# Altium PCB LVPowerModule.PcbDoc (part 2 of 2)
Units mm, origin at the board's own origin, x right, y up, seen from the top; angles counter-clockwise.
Board outline 100 x 60 mm, 2 copper layers (Top Layer, Bottom Layer); 81 components, 60 nets, 339 pads, 557 vias.
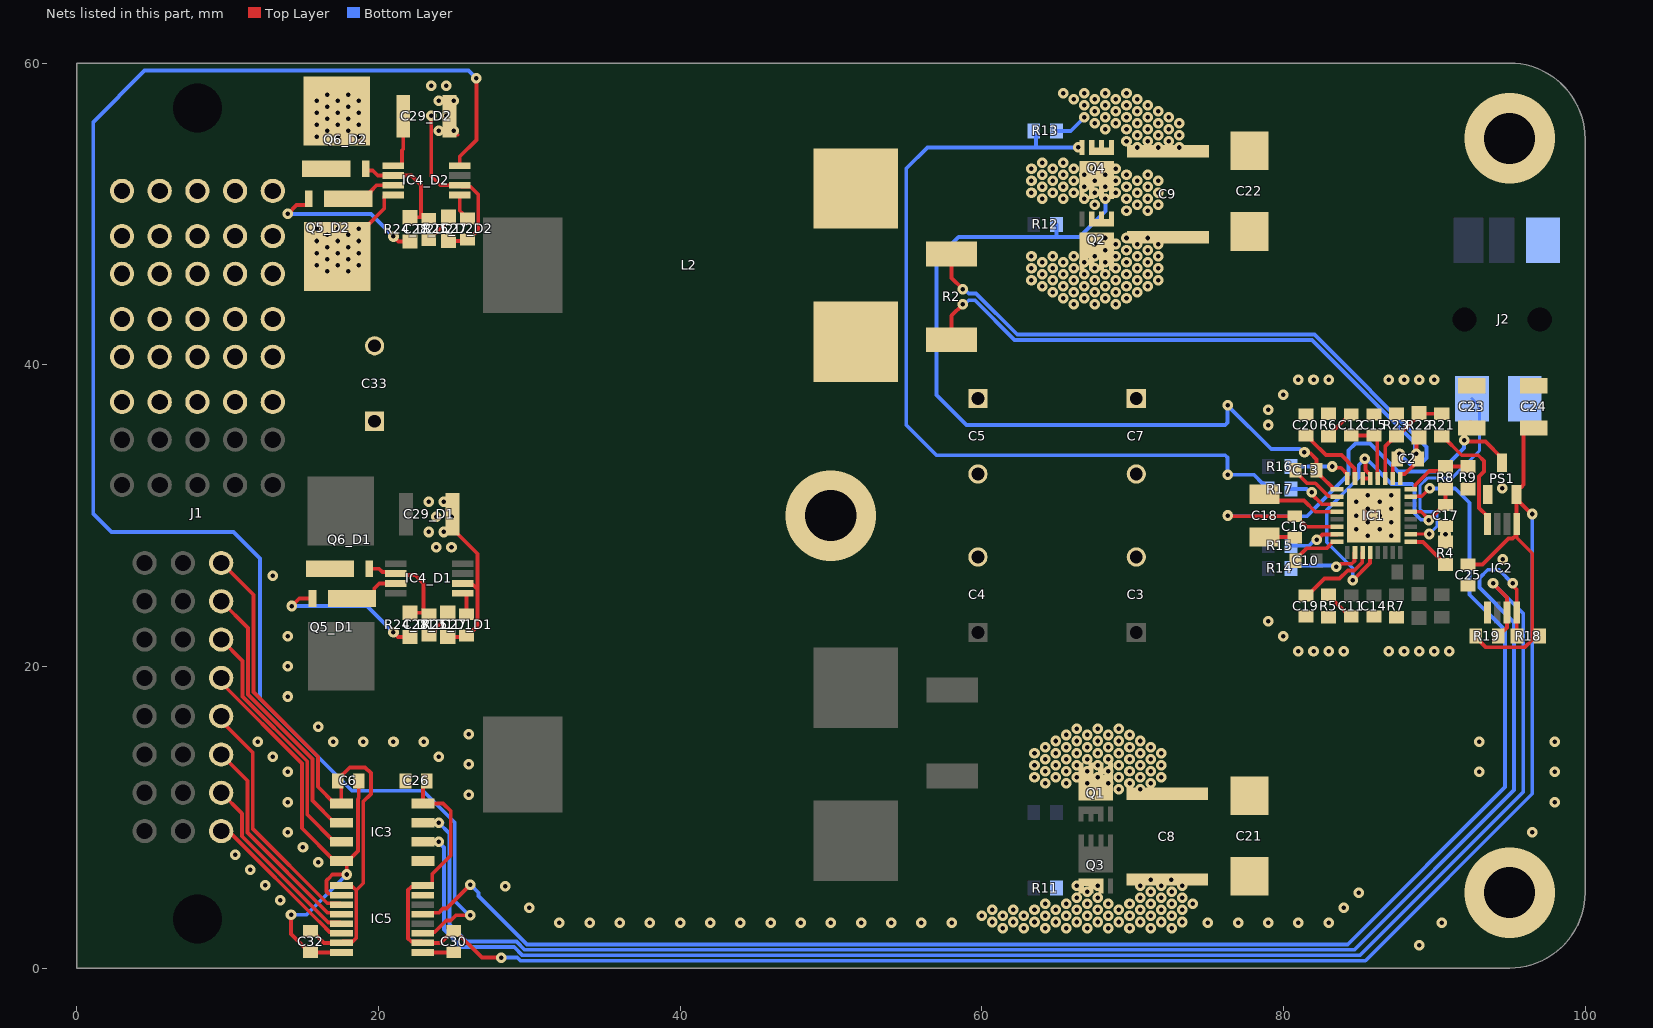
[diagram p2: the nets of this part, all layers, seen from the top]

## Via types
v1: diameter 0.7, hole 0.3, Top Layer to Bottom Layer, 554 vias
v2: diameter 6, hole 3.4, Top Layer to Bottom Layer, 3 vias

## Nets (pads, with @x,y where several pads share a name; then routed paths per layer and width w, separated by ;. In a path a pad name is that pad's centre, name@x,y a point inside that pad or via, vN(x,y) a via of type N, cw(c..) or ccw(c..) an arc to the next point about the centre after c; other vN are vias at no path point) (continued)
15FETL: Q4.4 R13.2 R17.2 | length 56.3
  Bottom Layer w0.254: R13.2@63.712,55.163 63.636,55.163 63.6,55.127 63.6,54.409 ; v1(66.395,54.409) 63.6,54.409 ; R17.2@79,31.75 79,31.825 78.702,32.123 78.627,32.123 78.05,32.7 v1(76.3,32.7) 76.3,33.843 76.143,34 57,34 55,36 55,53 56.409,54.409 63.6,54.409
15SW: C13.2 IC1.17 L2.1 Q2.1 Q2.2 Q2.3 Q2.10 Q4.5 Q4.6 Q4.7 Q4.8 Q4.9 R12.1 | length 54.6
  Top Layer w0.254: v1(81.4,34.2) 81.467,34.133 81.789,34.133 82.2,33.722 C13.2@82.2,33 82.2,32.9 82.503,32.597 82.512,32.597 83.252,31.857 83.252,31.773 83.275,31.75 IC1.17@83.55,31.75
  Bottom Layer w0.254: R12.1@64.95,49.3 64.95,48.498 64.975,48.473 ; v1(68.2,51) 68.2,50.2 66.473,48.473 64.975,48.473 ; v1(81.4,34.2) 81.279,34.2 81.079,34.4 79.2,34.4 v1(76.3,37.3) 76.3,36.157 76.143,36 59,36 57,38 57,47 58.473,48.473 64.975,48.473
  other v1: 69.6,50.2 71,50.2 67.5,50.6 70.3,50.6 71.7,50.6 64,51 65.4,51.004 66.8,51 69.6,51 71,51 63.3,51.4 64.7,51.4 66.1,51.4 67.5,51.4 68.9,51.4 70.3,51.4 71.7,51.4 64,51.8 65.4,51.8 66.8,51.8 68.2,51.8 69.6,51.8 71,51.8 63.3,52.2 64.7,52.2 66.1,52.2 67.5,52.2 68.9,52.2 70.3,52.2 71.7,52.2 64,52.6 65.4,52.6 66.8,52.6 68.2,52.6 69.6,52.6 71,52.6 63.3,53 64.7,53 66.1,53 67.5,53 68.9,53 64,53.4 65.4,53.4
15V: C2.2 C5.1 C7.1 IC1.9 IC4_D2.4 Q5_D2.5-6-7-8 R2.2 R22.2 | length 46.8
  Top Layer w0.254: Q5_D2.5-6-7-8@17.3,47.47 Q5_D2.5-6-7-8@18.765,48.935 ; v1(18.7,49) 19.04,49 20.387,50.347 20.387,51.147 20.485,51.245 IC4_D2.4@20.973,51.245 ; R2.2@58,41.75 58,43.25 v1(58.75,44) ; IC1.9@87.75,32.45 87.75,32.725 87.773,32.748 88.048,32.748 88.95,33.65 C2.2@88.95,33.75 C2.2@88.824,33.876 ; v1(88.824,34.101) C2.2@88.824,33.876 ; R22.2@89,35.2 88.824,35.024 C2.2@88.824,33.876
  Bottom Layer w0.254: v1(58.75,44) 58.871,44 59.144,44.273 59.555,44.273 62.184,41.644 81.906,41.644 88.738,34.812 88.738,34.187 v1(88.824,34.101)
  other v1: 16.6,46.2 18,46.2 15.9,46.6 17.3,46.6 18.7,46.6 16.6,47 18,47 15.9,47.4 17.3,47.4 18.7,47.4 16.6,47.8 18,47.8 15.9,48.2 17.3,48.2 18.7,48.2 16.6,48.6 18,48.6 15.9,49 17.3,49
15V+: C2.1 IC1.10 L2.2 R2.1 | length 42.8
  Top Layer w0.254: R2.1@58,47.25 58,45.75 v1(58.75,45) ; IC1.10@87.25,32.45 87.25,33.35 87.55,33.65 C2.1@87.55,33.75 ; C2.1@87.55,33.8 87.7,33.95 v1(87.7,34.1) 87.625,34.025 87.55,33.95 C2.1@87.55,33.8
  Bottom Layer w0.254: v1(58.75,45) 58.871,45 59.143,44.728 59.626,44.728 62.354,42 82.053,42 89.501,34.553 89.501,33.821 89.104,33.424 88.376,33.424 v1(87.7,34.1)
15V_COMP: C12.2 C15.2 IC1.12 | length 4.5
  Top Layer w0.254: C12.2@84.5,35.3 C15.2@86,35.3 86.227,35.073 86.227,32.473 IC1.12@86.25,32.45
15V_CTRL: IC1.7 IC5.13 | length 103
  Top Layer w0.254: IC5.13@22.95,3.568 23.041,3.659 23.998,3.659 24.183,3.844 24.186,3.844 24.294,3.952 24.526,3.952 v1(26.104,5.53) ; IC1.7@88.45,31.25 88.473,31.273 89.175,31.273 v1(89.7,31.798)
  Bottom Layer w0.254: v1(26.104,5.53) 26.644,4.99 26.644,4.766 29.841,1.569 84.269,1.569 94.7,12 94.7,22.4 92.35,24.75 92.35,30.85 91.4,31.8 89.702,31.8 v1(89.7,31.798)
15V_FB: IC1.11 R21.1 R22.1 R23.2 | length 6.9
  Top Layer w0.254: IC1.11@86.75,32.45 86.75,34.575 87.425,35.25 R23.2@87.5,35.25 87.575,35.25 89,36.675 R22.1@89,36.8 89.05,36.75 R21.1@90.5,36.75
15V_INJ: IC2.4 R21.2 | length 8
  Top Layer w0.254: R21.2@90.5,35.25 90.575,35.25 91.825,34 92.925,34 93.3,33.625 93.3,32.921 92.975,32.596 92.975,32.274 92.979,32.27 92.979,31.23 92.975,31.226 92.975,30.501 93.525,29.951 IC2.4@93.525,29.438
15V_OUT: C29_D2.2 IC4_D2.1 J1.P1 Q6_D2.5-6-7-8 | length 3.8
  Top Layer w0.254: IC4_D2.1@20.973,53.195 21.46,53.195 21.558,53.293 21.558,54.197 21.645,54.283 C29_D2.2@21.645,56.47
  other v1: 15.9,55.1 17.3,55.1 18.7,55.1 16.6,55.5 18,55.5 15.9,55.9 17.3,55.9 18.7,55.9 16.6,56.3 18,56.3 15.9,56.7 17.3,56.7 18.7,56.7 16.6,57.1 18,57.1 15.9,57.5 17.3,57.5 18.7,57.5 16.6,57.9 18,57.9
15V_SHDN: IC4_D2.8 IC5.11 | length 107.4
  Top Layer w0.254: IC5.11@22.95,2.298 23.041,2.389 23.737,2.389 24.281,2.932 24.281,2.935 24.496,3.15 24.8,3.15 25.15,3.5 v1(26.1,3.5) ; IC4_D2.8@25.397,53.195 25.397,53.801 26.5,54.904 v1(26.5,59)
  Bottom Layer w0.254: v1(26.1,3.5) 26,3.5 25.062,4.438 25.062,9.636 22.948,11.75 18.25,11.75 12.146,17.854 12.146,27.154 10.4,28.9 2.3,28.9 1.1,30.1 1.1,56.1 4.5,59.5 25.966,59.5 26.466,59 v1(26.5,59)
EXT_3V3: C6.1 C32.2 IC3.1 IC5.1 IC5.7 J1.S17 | length 39.8
  Top Layer w0.254: J1.S17@9.58,26.875 11.712,24.743 11.712,18.288 15.993,14.007 15.993,12.013 17.1,10.905 IC3.1@17.538,10.905 17.538,12.162 C6.1@17.3,12.4 17.3,12.5 18.1,13.3 19.122,13.3 19.5,12.922 19.5,11.546 19,11.046 19,5.623 18.528,5.151 ; C32.2@15.5,2.45 15.6,2.45 16.388,1.662 IC5.7@17.55,1.662 17.641,1.753 18.296,1.753 18.529,1.986 18.529,2.61 18.529,5.15 18.388,5.291 18.385,5.291 18.295,5.382 17.641,5.382 IC5.1@17.55,5.472
EXT_GND: C6.2 C32.1 IC3.4 IC5.2 IC5.8 J1.S20 | length 36
  Top Layer w0.254: J1.S20@9.58,19.235 9.58,18.91 14.925,13.565 14.925,9.271 17.1,7.095 IC3.4@17.538,7.095 IC3.4@17.702,7.095 ; v1@14.2,3.5 14.2,2.25 15.4,1.05 C32.1@15.5,1.05 15.522,1.028 IC5.8@17.55,1.028 ; IC5.2@17.55,4.838 17.46,4.929 16.699,4.929 16.55,5.077 16.55,5.79 16.805,6.045 16.805,6.051 16.954,6.2 v1(17.9,6.2) 17.9,6.897 IC3.4@17.702,7.095 ; C6.2@18.7,12.4 18.7,11.249 18.644,11.193 18.644,7.764 17.975,7.095 IC3.4@17.702,7.095
  Bottom Layer w0.254: v1(14.207,3.526) 15.226,3.526 v1(17.9,6.2)
EXT_SCL: IC3.3 J1.S19 | length 17
  Top Layer w0.254: J1.S19@9.58,21.775 11,20.355 11,17.993 15.281,13.712 15.281,10.185 17.1,8.365 IC3.3@17.538,8.365
EXT_SDA: IC3.2 J1.S18 | length 18.2
  Top Layer w0.254: J1.S18@9.58,24.315 11.356,22.539 11.356,18.141 15.637,13.86 15.637,11.099 17.1,9.635 IC3.2@17.538,9.635
GATE1_D1: Q5_D1.4 R24_D1.2 | length 10.3
  Top Layer w0.254: v1(14.25,24) 14.75,24.5 Q5_D1.4@15.63,24.5 ; v1(21,22.25) 21.3,21.95 R24_D1.2@22.1,21.95
  Bottom Layer w0.254: v1(14.25,24) 19.25,24 v1(21,22.25)
GATE1_D2: Q5_D2.4 R24_D2.2 | length 10.8
  Top Layer w0.254: v1(14,50) 14.577,50.577 15.257,50.577 15.38,50.7 Q5_D2.4@15.38,51 ; v1(21,48.5) 21.33,48.17 R24_D2.2@22.085,48.17
  Bottom Layer w0.254: v1(14,50) 19.5,50 v1(21,48.5)
GATE2_D1: C28_D1.2 IC4_D1.2 Q6_D1.4 R24_D1.1 | length 7.3
  Top Layer w0.254: Q6_D1.4@19.405,26.475 20.036,26.475 20.263,26.248 21.055,26.248 IC4_D1.2@21.153,26.15 21.251,26.052 22.448,26.052 23,25.5 23,23.7 C28_D1.2@23.15,23.55 ; R24_D1.1@22.1,23.55 C28_D1.2@23.15,23.55 ; C28_D1.2@23.35,23.45 23.25,23.45 C28_D1.2@23.15,23.55
GATE2_D2: C28_D2.2 IC4_D2.2 Q6_D2.4 R24_D2.1 | length 7.8
  Top Layer w0.254: Q6_D2.4@19.155,53.225 Q6_D2.4@19.155,52.993 19.278,52.87 19.63,52.87 19.955,52.545 22.205,52.545 22.835,51.915 22.835,49.77 ; R24_D2.1@22.085,49.77 22.835,49.77 ; C28_D2.2@23.335,49.67 23.235,49.77 22.835,49.77
GND: C3.2 C4.2 C5.2 C7.2 C8.1 C9.1 C14.1 C15.1 C16.1 C17.1 C18.1 C19.2 C20.2 C21.2 C22.2 C23.1 C24.1 C25.1 C26.1 C27_D1.1 C27_D2.1 C29_D1.1 C29_D2.1 C30.2 C33.2 IC1.33 IC2.5 IC3.5 IC4_D1.6 IC4_D2.6 IC5.9 IC5.15 J1.P2 J2.1 J2.4 PS1.1 Q3.1 Q3.2 Q3.3 Q3.10 Q4.1 Q4.2 Q4.3 Q4.10 R4.2 R5.1 R6.1 R7.1 R9.2 R11.1 R13.1 R23.1 R25_D1.1 R25_D2.1 | length 31.7
  Top Layer w0.254: IC5.9@22.95,1.028 24.978,1.028 C30.2@25,1.05 ; v1(23.5,56.5) 23.5,52.5 24.105,51.895 IC4_D2.6@25.397,51.895 25.495,51.797 26.104,51.797 26.202,51.699 26.204,51.699 26.338,51.565 26.338,51.562 26.625,51.276 26.625,48.925 26,48.3 C27_D2.1@25.9,48.3 25.8,48.2 R25_D2.1@24.65,48.2 ; R25_D1.1@24.6,21.95 25.75,21.95 C27_D1.1@25.85,22.05 25.95,22.05 26.569,22.669 26.569,23.935 26.567,23.937 26.567,27.463 24.905,29.125 C29_D1.1@24.905,30.075 ; C29_D2.1@24.725,56.47 24.725,55.52 C29_D2.1@24.873,55.372 ; v1(25,55.5) 25,55.245 25.005,55.25 25.25,55.25 ; IC4_D1.6@25.577,25.5 25.675,25.402 26.286,25.402 26.518,25.17 ; C18.1@78.75,28.58 80.72,28.58 C16.1@80.75,28.55 ; R4.2@90.675,28.25 R4.2@90.75,28.25
  Bottom Layer w0.254: R13.1@64.95,55.5 65.9,55.5 v1(66.8,56.4)
  other v1: 89,1.5 61.4,2.65 62.8,2.65 64.2,2.65 65.6,2.65 67,2.65 68.4,2.65 69.8,2.65 71.2,2.65 72.6,2.65 32,3 34,3 36,3 38,3 40,3 42,3 44,3 46,3 48,3 50,3 52,3 54,3 56,3 58,3 75,3 77,3 79,3 81,3 83,3 90.5,3 60.7,3.05 62.1,3.05 63.5,3.05 64.9,3.05 66.3,3.05 67.7,3.05 69.1,3.05 70.5,3.05 71.9,3.05 73.3,3.05 60,3.45 61.4,3.45 62.8,3.45 64.2,3.45 65.6,3.45 67,3.45 68.4,3.45 69.8,3.45 71.2,3.45 72.6,3.45 60.7,3.85 62.1,3.85 63.5,3.85 64.9,3.85 66.3,3.85 67.7,3.85 69.1,3.85 70.5,3.85 71.9,3.85 73.3,3.85 30,4 84,4 64.2,4.25 65.6,4.25 67,4.25 68.4,4.25 69.8,4.25 71.2,4.25 72.6,4.25 74,4.25 13.5,4.5 66.3,4.65 67.7,4.65 70.5,4.65 71.9,4.65 73.3,4.65 85,5 67,5.05 71.2,5.05 72.6,5.05 28.408,5.408 66.3,5.45 67.7,5.45 70.5,5.45 71.9,5.45 73.3,5.45 12.5,5.5 71.2,5.85 72.581,5.865 11.5,6.5 16,7 10.5,7.5 15,8 14,9 96.5,9 14,11 98,11 26,11.5 14,13 93,13 98,13 26,13.5 13,14 24,14 12,15 17,15 19,15 21,15 23,15 93,15 98,15 26,15.5 16,16 14,18 14,20 81,21 82,21 83,21 84,21 87,21 88,21 89,21 90,21 91,21 14,22 80,22 79,23 13,26 94.541,27.1 23.847,27.908 24.847,27.908 85.6,28.65 87.15,28.65 90.75,28.76 23.347,28.908 24.347,28.908 84.825,29.1 86.375,29.1 85.6,29.55 87.15,29.55 23.847,29.908 24.847,29.908 84.825,30 86.375,30 85.6,30.45 87.15,30.45 23.347,30.908 24.347,30.908 84.825,30.9 86.375,30.9 85.6,31.35 87.15,31.35 94.5,31.81 79,36 79,37 80,38 81,39 82,39 83,39 87,39 88,39 89,39 90,39 70.3,54.4 71.7,54.4 73.1,54.4 69.6,54.8 71,54.8 72.4,54.8 70.3,55.2 71.7,55.2 73.1,55.2 24,55.5 68.2,55.6 69.6,55.6 71,55.6 72.4,55.6 67.5,56 68.9,56 70.3,56 71.7,56 73.1,56 68.2,56.4 69.6,56.4 71,56.4 72.4,56.4 24.5,56.5 67.5,56.8 68.9,56.8 70.3,56.8 71.7,56.8 66.8,57.2 68.2,57.2 69.6,57.2 71,57.2 24,57.5 25,57.5 66.1,57.6 67.5,57.6 68.9,57.6 70.3,57.6 65.4,58 66.789,57.997 68.2,58 69.6,58 23.5,58.5 24.5,58.5
  other v2: 95,5 95,55
ILIM: IC1.8 R8.1 R9.1 | length 4.6
  Top Layer w0.254: IC1.8@88.45,31.75 88.725,31.75 88.748,31.773 88.748,32.03 89.67,32.952 90.452,32.952 R8.1@90.75,33.25 R9.1@92.25,33.25
INTVCC: C17.2 IC1.5 IC1.13 IC1.14 IC1.28 R8.2 | length 25.1
  Top Layer w0.254: v1(84.6,25.7) 85.75,26.85 IC1.28@85.75,27.55 ; IC1.14@85.25,32.45 IC1.13@85.75,32.45 85.75,32.725 85.456,33.019 85.456,33.696 v1(85.402,33.75) ; IC1.5@88.45,30.25 89.145,30.25 89.626,29.769 v1(89.626,29.698) ; v1@89.628,29.744 89.694,29.744 90.65,30.7 C17.2@90.75,30.7 R8.2@90.75,31.75
  Bottom Layer w0.254: v1(84.6,25.7) 84.6,26.501 82.875,28.226 82.875,30.375 85,32.5 85,33.348 v1(85.402,33.75) 85.523,33.75 85.723,33.55 85.728,33.55 87.178,32.1 88.55,32.1 88.7,31.95 88.7,30.15 89.126,29.724 89.6,29.724 v1(89.626,29.698)
NetC10_1: C10.1 IC1.24 | length 3.3
  Top Layer w0.254: C10.1@80.8,27 80.8,27.1 81.525,27.825 82.85,27.825 83.252,28.227 83.527,28.227 IC1.24@83.55,28.25
NetC11_1: C11.1 R5.2 | length 2.2
  Top Layer w0.254: R5.2@83,24.75 83.075,24.75 83.373,24.452 83.373,24.327 84.4,23.3 C11.1@84.5,23.3
NetC12_1: C12.1 R6.2 | length 2.1
  Top Layer w0.254: R6.2@83,35.25 83.075,35.25 83.373,35.548 83.373,35.673 C12.1@84.4,36.7
NetC13_1: C13.1 IC1.18 | length 3.5
  Top Layer w0.254: C13.1@80.8,33 80.8,32.9 81.557,32.143 82.119,32.143 82.99,31.273 83.527,31.273 IC1.18@83.55,31.25
NetC18_2: C18.2 IC1.20 | length 5.3
  Top Layer w0.254: C18.2@78.75,31.42 79.17,31 81.361,31 82.111,30.25 IC1.20@83.55,30.25
NetC19_1: C19.1 IC1.27 | length 5.3
  Top Layer w0.254: C19.1@81.5,24.7 81.6,24.7 82.723,25.823 83.727,25.823 84.267,26.363 84.698,26.363 85.227,26.892 85.227,27.527 IC1.27@85.25,27.55
NetC20_1: C20.1 IC1.15 | length 4.9
  Top Layer w0.254: C20.1@81.5,35.3 81.6,35.3 81.863,35.037 81.863,34.962 82.822,34.003 83.849,34.003 84.727,33.125 84.727,32.473 IC1.15@84.75,32.45
NetC27_D1_2: C27_D1.2 IC4_D1.5 | length 1.6
  Top Layer w0.254: IC4_D1.5@25.577,24.85 25.752,24.85 25.85,24.752 C27_D1.2@25.85,23.45
NetC27_D2_2: C27_D2.2 IC4_D2.5 | length 1.8
  Top Layer w0.254: IC4_D2.5@25.397,51.245 25.397,50.203 25.537,50.063 25.537,49.963 25.8,49.7 C27_D2.2@25.9,49.7
NetC28_D1_1: C28_D1.1 R25_D1.2 | length 2.1
  Top Layer w0.254: C28_D1.1@23.35,22.05 23.45,22.05 23.713,22.313 23.713,22.413 24.227,22.927 24.227,23.202 24.575,23.55 R25_D1.2@24.6,23.55
NetC28_D2_1: C28_D2.1 R25_D2.2 | length 2.1
  Top Layer w0.254: C28_D2.1@23.335,48.27 23.435,48.27 23.698,48.533 23.698,48.633 24.277,49.212 24.277,49.452 24.625,49.8 R25_D2.2@24.65,49.8
NetIC1_16: IC1.16 R16.1 | length 4.2
  Top Layer w0.254: v1(83.25,33.25) 83.335,33.165 83.81,33.165 84.25,32.725 IC1.16@84.25,32.45
  Bottom Layer w0.254: R16.1@80.5,33.25 v1(83.25,33.25)
NetIC1_19: IC1.19 R17.1 | length 3.5
  Top Layer w0.254: v1(81.871,31.545) 81.871,31.429 82.551,30.75 IC1.19@83.55,30.75
  Bottom Layer w0.254: R17.1@80.5,31.75 81.545,31.75 81.751,31.545 v1(81.871,31.545)
NetIC1_23: IC1.23 R15.1 | length 3.4
  Top Layer w0.254: v1(82.216,28.404) 82.242,28.404 82.588,28.75 IC1.23@83.55,28.75
  Bottom Layer w0.254: R15.1@80.5,28 81.702,28 82.106,28.404 v1(82.216,28.404)
NetIC1_26: IC1.26 R14.1 | length 5.1
  Top Layer w0.254: v1(83.5,26.6) 83.621,26.6 83.819,26.798 84.535,26.798 84.727,26.99 84.727,27.527 IC1.26@84.75,27.55
  Bottom Layer w0.254: R14.1@80.5,26.5 80.677,26.677 83.423,26.677 v1(83.5,26.6)
NetIC2_7: IC2.7 IC3.6 R19.1 | length 101.5
  Top Layer w0.254: v1(93.9,25.5) 94.825,24.575 IC2.7@94.825,23.562 94.825,22.575 94.623,22.373 94.548,22.373 94.25,22.075 R19.1@94.25,22
  Bottom Layer w0.254: v1(24,8.365) 24,8.343 24.35,7.993 24.35,2.55 25.5,1.4 29.003,1.4 29.563,0.84 85.065,0.84 95.9,11.675 95.9,23.5 v1(93.9,25.5)
NetIC2_8: IC2.8 IC3.7 R18.1 | length 104.4
  Top Layer w0.254: v1(95.2,25.5) 95.2,25.379 95.475,25.104 IC2.8@95.475,23.562 95.475,22.025 R18.1@95.5,22
  Bottom Layer w0.254: v1@24.247,9.635 v1(24,9.635) 24.706,8.929 24.706,2.894 25.844,1.756 29.151,1.756 29.694,1.213 84.713,1.213 95.3,11.8 95.3,22.917 92.994,25.223 92.994,25.852 93.551,26.409 94.291,26.409 v1(95.2,25.5)
NetIC4_D1_3: IC4_D1.3 Q5_D1.1-2-3 Q6_D1.1-2-3 | length 3.5
  Top Layer w0.254: Q5_D1.1-2-3@18.25,24.5 19.3,24.5 19.723,24.923 19.723,25.164 20.06,25.5 IC4_D1.3@21.153,25.5
NetIC4_D2_3: IC4_D2.3 Q5_D2.1-2-3 Q6_D2.1-2-3 | length 3.4
  Top Layer w0.254: Q5_D2.1-2-3@18,51 19.05,51 19.473,51.423 19.473,51.489 19.879,51.895 IC4_D2.3@20.973,51.895
NetIC5_3: IC5.3 J1.S21 | length 16.3
  Top Layer w0.254: J1.S21@9.58,16.695 9.58,16.37 11.675,14.275 11.675,9.225 16.608,4.293 17.46,4.293 IC5.3@17.55,4.202
NetIC5_4: IC5.4 J1.S22 | length 14.4
  Top Layer w0.254: J1.S22@9.58,14.155 11.319,12.416 11.319,8.981 16.642,3.658 17.46,3.658 IC5.4@17.55,3.568
NetIC5_5: IC5.5 J1.S23 | length 12.4
  Top Layer w0.254: J1.S23@9.58,11.615 10.963,10.232 10.963,8.737 16.678,3.023 17.46,3.023 IC5.5@17.55,2.932
NetIC5_6: IC5.6 J1.S24 | length 10.8
  Top Layer w0.254: J1.S24@9.58,9.075 9.838,8.816 10.334,8.816 16.081,3.069 16.085,3.069 16.219,2.935 16.219,2.931 16.761,2.389 17.46,2.389 IC5.6@17.55,2.298
RT: IC1.1 R4.1 | length 3
  Top Layer w0.254: IC1.1@88.45,28.25 89.25,28.25 90.377,27.123 90.377,27.048 90.675,26.75 R4.1@90.75,26.75
SYNC: IC1.2 J2.5 | length 14.1
  Top Layer w0.2: IC1.2@88.45,28.75 88.475,28.775 v1(89.675,28.775)
  Bottom Layer w0.2: v1(89.675,28.775) 90.178,29.278 90.178,30.092 90.02,30.25 89.242,30.25 89.062,30.43 89.062,31.987 89.575,32.5 91.2,32.5 93,34.3 93,37.265 J2.5@92.51,37.755
V_IN: C8.2 C9.2 C16.2 C21.1 C22.1 C23.2 C33.1 IC1.22 J1.P3 PS1.3 Q1.5 Q1.6 Q1.7 Q1.8 Q1.9 Q2.5 Q2.6 Q2.7 Q2.8 Q2.9 | length 33.4
  Top Layer w0.254: v1(76.3,30) 76.35,29.95 80.85,29.95 81.55,29.25 IC1.22@83.55,29.25 ; C23.2@92.417,36.183 92.8,35.8 92.383,35.8 92,35.417 v1(92,35) 92.091,34.909 93.391,34.909 94.5,33.8 PS1.3@94.5,33.5
  Bottom Layer w0.254: v1(76.3,30) 76.354,29.946 81.546,29.946 82.207,30.607 84.326,32.726 84.326,34.326 84.773,34.773 85.747,34.773 87.593,32.927 90.427,32.927 91.987,34.487 91.987,34.987 v1(92,35)
  other v1: 69.1,11.85 70.5,11.85 64.2,12.25 65.6,12.25 67,12.25 68.4,12.25 69.8,12.25 71.2,12.25 63.5,12.65 64.9,12.65 66.3,12.65 67.7,12.65 69.1,12.65 70.5,12.65 71.9,12.65 64.2,13.05 65.6,13.05 67,13.05 68.4,13.05 69.8,13.05 71.2,13.05 63.5,13.45 64.9,13.45 66.3,13.45 67.7,13.45 69.1,13.45 70.5,13.45 71.9,13.45 64.2,13.85 65.6,13.85 67,13.85 68.4,13.85 69.8,13.85 71.2,13.85 63.5,14.25 64.9,14.25 66.3,14.25 67.7,14.25 69.1,14.25 70.5,14.25 71.9,14.25 64.2,14.65 65.6,14.65 67,14.65 68.4,14.65 69.8,14.65 71.2,14.65 64.9,15.05 66.3,15.05 67.7,15.05 69.1,15.05 70.5,15.05 65.6,15.45 67,15.45 68.4,15.45 69.8,15.45 66.3,15.85 67.7,15.85 69.1,15.85 66.1,44 67.5,44 68.9,44 65.4,44.4 66.8,44.4 68.2,44.4 69.6,44.4 64.7,44.8 66.1,44.8 67.5,44.8 68.9,44.8 70.3,44.8 64,45.2 65.4,45.2 66.8,45.2 68.2,45.2 69.6,45.2 71,45.2 63.3,45.6 64.7,45.6 66.1,45.6 67.5,45.6 68.9,45.6 70.3,45.6 71.7,45.6 64,46 65.4,46 66.8,46 68.2,46 69.6,46 71,46 63.3,46.4 64.7,46.4 66.1,46.4 67.5,46.4 68.9,46.4 70.3,46.4 71.7,46.4 64,46.8 65.4,46.8 66.8,46.8 68.2,46.8 69.6,46.8 71,46.8 63.3,47.2 64.7,47.2 66.1,47.2 67.5,47.2 68.9,47.2 70.3,47.2 71.7,47.2 68.2,47.6 69.6,47.6 71,47.6 67.5,48 68.9,48 70.3,48 71.7,48 68.2,48.4 69.6,48.4 71,48.4
  other v2: 50,30
V_LDO: C24.2 C25.2 C26.2 C30.1 IC2.1 IC3.8 IC5.10 IC5.16 PS1.2 R18.2 R19.2 | length 137.4
  Top Layer w0.254: C26.2@23.005,12.495 C26.2@23.1,12.4 ; C26.2@23.2,12.4 22.962,12.162 IC3.8@22.962,10.905 24.295,10.905 24.8,10.4 24.8,7.45 23.573,6.223 23.573,5.563 23.483,5.472 IC5.16@22.95,5.472 22.859,5.382 22.174,5.382 21.971,5.179 21.971,1.955 22.174,1.753 22.859,1.753 IC5.10@22.95,1.662 24.112,1.662 24.9,2.45 C30.1@25,2.45 25.1,2.45 26.86,0.69 v1(28.134,0.69) ; C25.2@92.25,26.75 93.202,26.75 94.923,28.472 95.2,28.472 95.377,28.649 ; R19.2@92.5,21.675 93,21.675 93.404,21.271 96.02,21.271 96.5,21.751 96.5,27.5 95.475,28.525 95.475,28.649 95.475,28.925 IC2.1@95.475,29.438 ; R19.2@92.725,22.025 R19.2@92.75,22 ; IC2.1@95.463,29.45 PS1.2@95.463,31.087 ; C24.2@95.93,35.67 95.93,32.047 95.781,31.898 95.648,31.898 95.45,31.7 95.45,31.1 PS1.2@95.463,31.087 ; v1(96.5,30.1) 96.45,30.1 PS1.2@95.463,31.087
  Bottom Layer w0.254: v1(28.134,0.69) 29.21,0.69 29.416,0.484 85.434,0.484 96.5,11.55 v1(96.5,30.1)
pads on no net: IC1.3 IC1.4 IC1.21 IC2.2 IC2.6 IC4_D1.7 IC4_D2.7 J1.MH1 J1.MH2 J1.S1 J1.S2 J1.S3 J1.S4 J1.S5 J1.S6 J1.S7 J1.S8 J1.S9 J1.S10 J1.S11 J1.S12 J1.S13 J1.S14 J1.S15 J1.S16 J2.2 J2.3 J2.MH1 J2.MH2 L1.MP1 L2.MP1

## Polygon pours and split planes (outlines as drawn)
GND on Top Layer "GND_L01_P042" (solid, pour order 42): 1,29 1,4 4,1 25.94,1 25.94,28.94 26,29
GND on Top Layer "NONET_L-01_P-001" (solid, pour order 34): 77,40 77,20 99,20 99,40
5SW on Top Layer "NONET_L-01_P-001" (solid, pour order 30): 28,5 28.715,5 28,5.715
GND on Top Layer "NONET_L-01_P-001" (solid, pour order 32): 63,59 96,59 99,56 99,43 96,40 94,40 91,43 91,49 63,49
15SW on Top Layer "NONET_L-01_P-001" (solid, pour order 28): 31,42 28,45 28,56 31,59 63,59 66,56 66,54 75,54 75,49 60,49 55,49 55,42
V_IN on Top Layer "Top Layer-V_bat" (solid, pour order 23): 67.987,33 76,33 78,35 78,38 80,40 89,40 91,42 91,49 89,51 77,51 75,49 60,49 60,42 70,42 72,40 72,37.013
GND on Top Layer "NONET_L-01_P-001" (solid, pour order 33): 91,17 94,20 96,20 99,17 99,4 96,1 28,1 28,12 91,12
5SW on Top Layer "NONET_L-01_P-001" (solid, pour order 29): 28,17 28,7 30,5 66,5 66,6 75,6 75,11 55,11 48,18 29,18
V_IN on Top Layer "NONET_L-01_P-001" (solid, pour order 31): 72,23 72,20 70,18 60,18 60,11 75,11 77,9 89,9 91,11 91,18 89,20 80,20 78,22 78,25 75,28 67,28
V_IN on Top Layer "NONET_L-01_P-001" (solid, pour order 38): 1,42 1,36 18,36 22,32 23,32 30,25 76,25 77,26 77,34 76,35 29,35 22,42
15V_OUT on Top Layer "NONET_L-01_P-001" (solid, pour order 35): 1,47 1,56 4,59 22,59 22,54.987 14.987,54.987 14,54 14,47
5V on Top Layer "Top Layer-5V" (solid, pour order 40): 27,18 46.617,18 70,18 72,20 72,23 70,25 30,25 27.95,22.95 15,22.95 15,17 26,17
GND on Top Layer "NONET_L-01_P-001" (solid, pour order 39): 22.75,59 22.75,55 25.5,55 25.5,59
GND on Top Layer "NONET_L-01_P-001" (solid, pour order 22): 22.75,31.5 22.75,27.5 25.5,27.5 25.5,31.5
5V_OUT on Top Layer "NONET_L-01_P-001" (solid, pour order 37): 1,36 1,30 13,30 15,28 22,28 22,32 18,36
NetIC4_D2_3 on Top Layer "NONET_L-01_P-001" (solid, pour order 36): 15,54 15,50 15.05,49.95 20,49.95 20,54
5V+ on Top Layer "NONET_L-01_P-001" (solid, pour order 27): 60,13 57,13 54,16 49,16 49,13 51,11 60,11
15V+ on Top Layer "NONET_L-01_P-001" (solid, pour order 26): 49,49 51,47 60,47 60,48 58,50 49,50
15V on Top Layer "NONET_L-01_P-001" (solid, pour order 43): 69.987,35 72,37.013 72,40 70,42 31,42 26,47 21.94,47 19.49,49.45 15.08,49.45 15.08,44.995 18.075,42 22,42 29,35
NetIC4_D1_3 on Top Layer "NONET_L-01_P-001" (solid, pour order 24): 15.2,27.487 15.2,27.01 15.2,23.4 19.8,23.4 19.8,27.487
no net on Top Solder (solid): 63.728,59 67.528,55.2 68.721,55.2 69.915,54.006 79.994,53.994 81,55 81,57.5 79.5,59
no net on Top Solder (solid): 59.5,49.5 65.694,49.5 cw(c66.49,49.705) 67.073,50.284 75,50.284 75,53.257 65.5,53.257 65.5,56.5 63,59 56,59 55,58 55,51.5 56,50.5 58.5,50.5
no net on Top Solder (solid): 55.5,6 56.4,5.1 64.725,5.1 65.925,6.3 68.1,6.3 68.1,6.764 75,6.764 75,10.654 70.654,10.654 69.215,9.215 69.215,9.209 68.1,9.209 68.1,10.7 60.493,10.772 60.221,10.5 56.5,10.5 55.5,9.5
no net on Top Solder (solid): 55.5,3.5 56.5,4.5 65.5,4.5 66.2,5.2 67.9,5.2 67.9,4.83 68.08,4.65 69.02,4.65 69.56,5.19 69.56,6.254 79.746,6.254 81,5 81,2.5 79.5,1 56.5,1 55.5,2
no net on Top Solder (solid): 60.2,47.7 61.3,48.8 79.7,48.8 81,47.5 81,43.5 79.5,42 61.5,42 60.2,43.3
no net on Top Solder (solid): 60.4,16.4 62,18 79.5,18 81,16.5 81,12.5 79.7,11.2 61.8,11.2 60.4,12.6
no net on Top Solder (solid): 65.854,49.5 66.097,49.5 65.854,49.743
GND on Bottom Layer "GND_L02_P057" (solid, pour order 57): 4,59 1.1,56.1 1.1,3.9 4,1 96,1 99,4 99,56 96,59
GND on Bottom Layer "GND_L02_P046" (solid, pour order 46): 75,42 95,42 95,18 75,18
GND on Bottom Layer "GND_L02_P047" (solid, pour order 47): 1,4 4,1 23.65,1 25.94,3.29 25.94,16.49 15,16.49 15,27.279 13.279,29 1,29
V_IN on Bottom Layer "V_IN_L02_P044" (solid, pour order 44): 58,18 58,11 92,11 94,13 94,18
5V on Bottom Layer "5V_L02_P054" (solid, pour order 54): 15,17 15,27.375 26,27.375 26,17
V_IN on Bottom Layer "V_IN_L02_P049" (solid, pour order 49): 59,49.5 59,42.5 95,42.5 95,49.5
15SW on Bottom Layer "15SW_L02_P050" (solid, pour order 50): 55,53.755 55,49.5 95,49.5 95,53.755
5SW on Bottom Layer "5SW_L02_P051" (solid, pour order 51): 55.5,10.5 55.5,6 87,6 91.5,10.5
5V_OUT on Bottom Layer "5V_OUT_L02_P053" (solid, pour order 53): 1,36 1,30 13,30 15,28 22,28 22,32 18,36
15V on Bottom Layer "15V_L02_P055" (solid, pour order 55): 14.61,44.964 28.5,45.031 28.5,54.5 14.61,54.5
15V_OUT on Bottom Layer "15V_OUT_L02_P058" (solid, pour order 58): 1,47 1,56 4,59 22,59 22,54.987 14.987,54.987 14,54 14,47
no net on Bottom Solder (solid): 59,47.834 69.821,47.834 71.488,49.5 93.5,49.5 93.5,42.639 62.735,42.639 59,46.374
no net on Bottom Solder (solid): 84.5,59 56,59 55,58 55,55 61.525,55 62.779,56.254 66.067,56.254 68.052,54.269 89.231,54.269
no net on Bottom Solder (solid): 55.639,52.735 56.659,53.755 89.745,53.755 93.5,50 68.1,50 67.1,51 63.5,51 63.5,50.914 62.586,50 55.639,50
no net on Bottom Solder (solid): 55.639,7.265 55.639,9.639 56.5,10.5 57.196,10.5 58.696,9 69,9 70.5,10.5 91.5,10.5 87,6 74,6 73,7 63.386,7 62.525,6.139 56.765,6.139
no net on Bottom Solder (solid): 93.461,17.354 93.461,12.461 92,11 68.85,11 68.084,11.766 63.937,11.766 63.221,11.05 59.854,11.05 58.452,12.452 63.354,17.354
no net on Bottom Solder (solid): 57.833,5.167 60.767,2.233 73.062,2.233 74.162,3.333 84.762,3.333 86.919,5.49 69.86,5.49 68.916,4.546 62.725,4.546 62.725,5.167

## Other copper
Bottom Layer:
  pour cut-out: 95,39.5 95,36 97.4,36 97.4,39.5

## Silkscreen, mask and mechanical layers (free items; w line width, h text height)
Top Overlay:
  text "15V-SW" at 76.9,37.204 h0.5
  text "15V-FETH" at 76.9,34.904 h0.5
  text "15V-FETL" at 76.9,32.604 h0.5
  text "V_BAT" at 74.6,29.873 h0.5
  text "5V-FETL" at 76.9,27.204 h0.5
  text "5V-FETH" at 76.9,24.904 h0.5
  text "5V-SW" at 76.9,22.604 h0.5
Bottom Overlay:
  text "Low Voltage Power Module V3.1" at 35,53 h4 r90
  text "Designed for Pollux III" at 40,51.501 h3 r90
Top Solder:
  text "LVPM V3.1" at 29,29.031 h4
Mechanical 1:
  the board outline again, w0.254